# Altium PCB fpga_board.PcbDoc (part 2 of 4)
Units mil, origin at the board's own origin, x right, y up, seen from the top; angles counter-clockwise.
Board outline 3204.72 x 2960.63 mil, 6 copper layers (Top Layer, GND1, SIG, PWR, GND2, Bottom Layer), stack 32.112 mil thick; 192 components, 182 nets, 714 pads, 321 vias.
Unrouted connection lines stored in the file: 11.
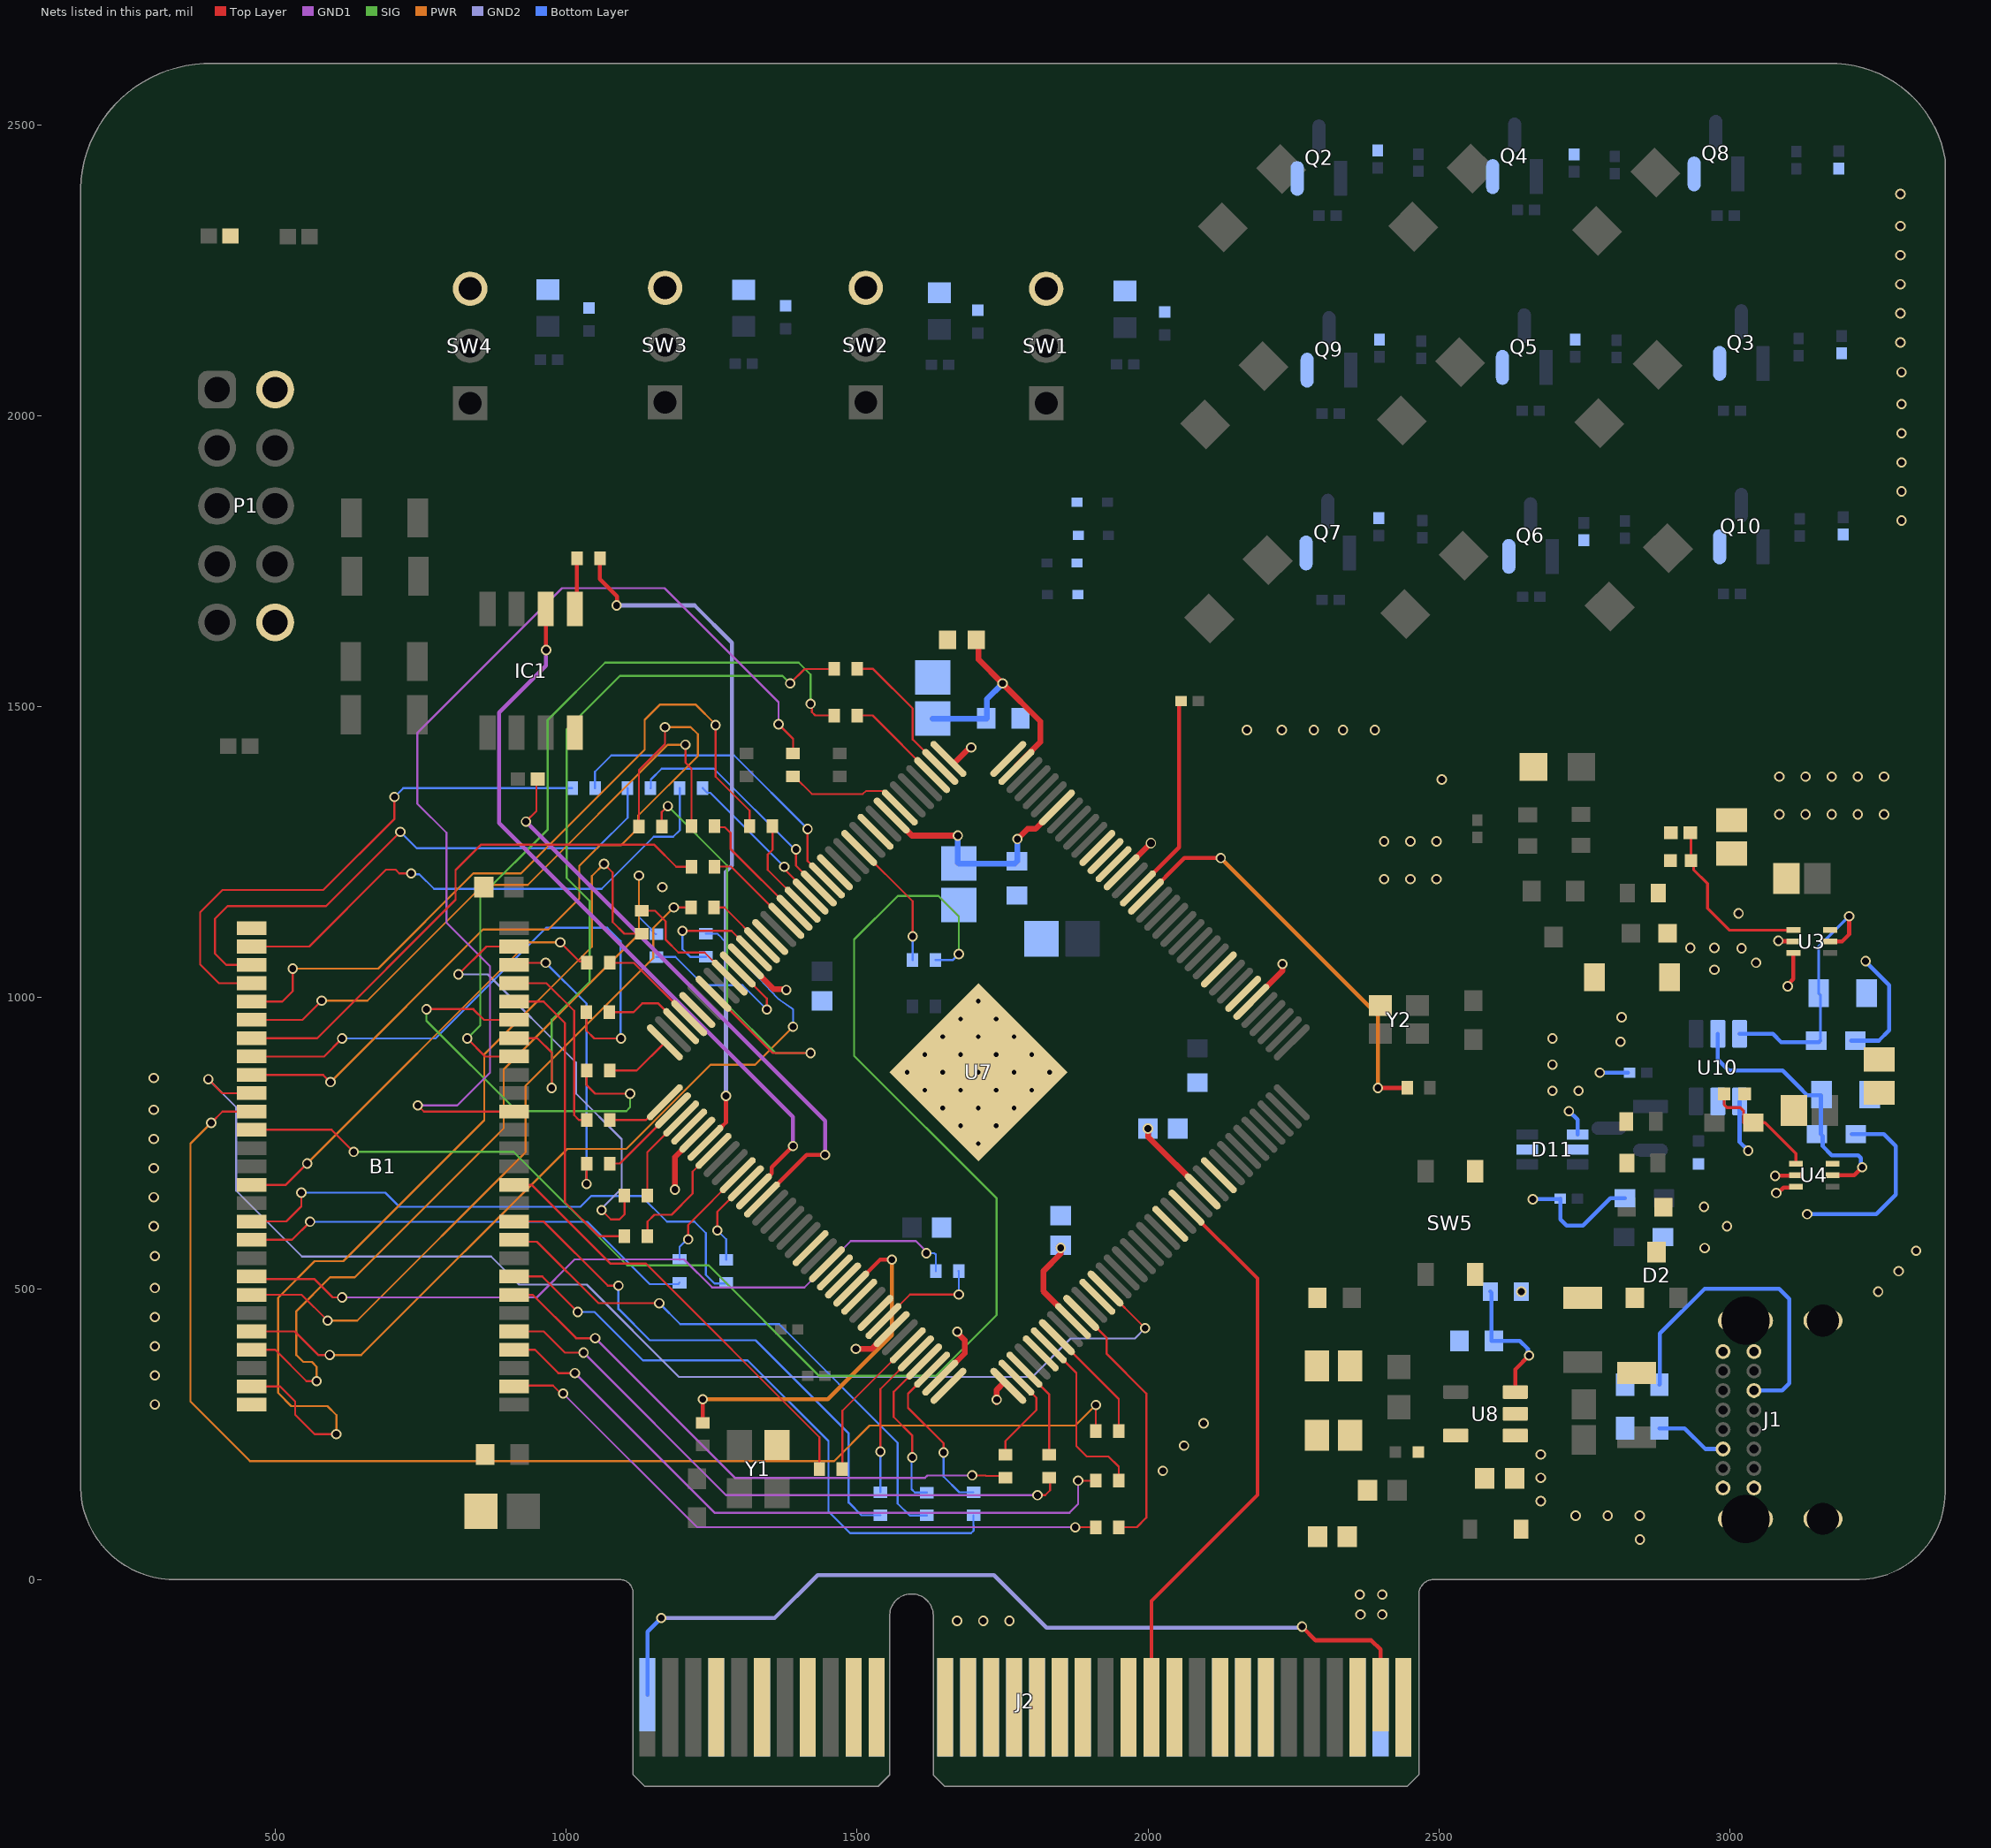
[diagram p6: the nets of this part, all layers, seen from the top]

## Part data (continued)
D1_1 D1_2 D1_3 D2_1 D2_2 D2_3 D3_1 D3_2 D3_3: library part CMP-22017-000041-1, "LED RED CLEAR CHIP SMD", Case Code (Imperial)=1206, Case Code (Metric)=3216, Color=Red, Forward Current=30mA, Forward Voltage=2V, Lens Color=Colorless, Max Operating Temperature=85°C, Min Operating Temperature=-55°C, Package Quantity=1, Power Dissipation=75mW, Reverse Voltage=5V, Test Current=20mA, Case/Package=1206, Depth=1.6mm, Dominant Wavelength=631nm, Height=1.1mm, Illumination Color=Red, Lead Free="Lead Free", Length=3.2mm, Lens Style=Diffused, Lens Transparency=Clear, Luminous Intensity=54mcd, Mount="Surface Mount", Number of Elements=1, Number of LEDs=1, Number of Pins=2, Packaging="Tape and Reel", Power Rating=75mW, Radiation Hardening=No, RoHS Compliant=Yes, Viewing Angle=130°, Wavelength=639nm, Width=1.6mm
D2: library part CMP-1060-01004-1, "Zener Voltage Regulator, 225 mW, 3-Pin SOT-23, Pb-Free, Tape and Reel", Manufacturer="On Semiconductor", ComponentLink1Description="Manufacturer URL", ComponentLink1URL=http://www.onsemi.com/, ComponentLink2Description=Datasheet, ComponentLink2URL=http://www.onsemi.cn/pub_link/Collateral/MMBZ5221BLT1-D.PDF, ComponentLink3Description="Package Specification", ComponentLink3URL=http://www.onsemi.cn/pub_link/Collateral/318-08.PDF, DatasheetVersion="Rev. 12", Mounting Technology="Surface Mount", PackageDescription="3-Pin Small Outline Transistor, Body 2.92 x 1.3 mm, Pitch 0.95 mm", PackageReference=SOT-23-3-318-08, PackageVersion="Rev. AP, 11/2009", Packing="Tape and Reel", PartNumber=MMBZ5223BLT1G, RoHS=Pb-Free, VZ Typ (V)=2.7
D3 D4: library part CMP-1426-00006-7, "WURTH ELEKTRONIK - 150060VS75000 - LED, Green, SMD, 0603, 30 mA, 2 V, 570 nm", Case Code (Imperial)=0603, Case Code (Metric)=1608, Color=Green, Forward Current=100mA, Forward Voltage=2V, Max Junction Temperature (Tj)=95°C, Max Operating Temperature=85°C, Max Reverse Voltage (DC)=5V, Min Operating Temperature=-40°C, Power Dissipation=72mW, Test Current=20mA, Case/Package=0603, Dominant Wavelength=570nm, Height=700µm, Length=1.6mm, Lens Style="Clear, Rectangular", Luminous Intensity=40mcd, Mount="Surface Mount", Number of Pins=2, Packaging="Tape and Reel", Peak Wavelength=572nm, REACH SVHC=Unknown, Reverse Voltage=5V, RoHS=Compliant, Viewing Angle=140°, Wavelength=570nm, Width=800µm
D5: library part CMP-44529-000062-1, "LED GREEN CLEAR CHIP SMD", Case Code (Imperial)=0805, Case Code (Metric)=2012, Color=Green, Forward Current=20mA, Forward Voltage=2.1V, Lens Color=Clear, Max Operating Temperature=85°C, Min Operating Temperature=-40°C, Package Quantity=1, Case/Package=0805, Dominant Wavelength=570nm, Height=0.4mm, Illumination Color=Green, Lead Free="Lead Free", Length=2mm, Lens Style=Clear, Luminous Intensity=40mcd, Mount="Surface Mount", Number of LEDs=1, Number of Pins=2, Packaging="Tape and Reel", RoHS Compliant=Yes, Series=APHCM, Test Current=20mA, Viewing Angle=110°, Wavelength=570nm, Width=1.25mm
D6: library part CMP-1055-00466-1, "Schottky Barrier Diode, 2-Pin SOD-323, Pb-Free, Tape and Reel", Manufacturer="On Semiconductor", ComponentLink1Description="Manufacturer URL", ComponentLink1URL=http://www.onsemi.com/, ComponentLink2Description=Datasheet, ComponentLink2URL=http://www.onsemi.cn/pub_link/Collateral/NSR0320MW2T1-D.PDF, ComponentLink3Description="Package Specification", ComponentLink3URL=http://www.onsemi.com/pub_link/Collateral/477-02.PDF.1, Configuration=Single, DatasheetVersion="Rev. 4", IFSM Max (A)=5, Mounting Technology="Surface Mount", PackageDescription="2-Pin SOD, Body 1.7 x 1.25 mm", PackageReference=SOD-323-2-477-02, PackageVersion="Rev. H, 03/2007", Packing="Tape and Reel", PartNumber=NSR0320MW2T1G, RoHS=TRUE
D7 D8 D9 D10: library part CMP-1060-00750-1, "Zener Voltage Regulator, 500 mW, 2-Pin SOD-523, Pb-Free, Tape and Reel", Manufacturer="On Semiconductor", ComponentLink1Description="Manufacturer URL", ComponentLink1URL=http://www.onsemi.com/, ComponentLink2Description=Datasheet, ComponentLink2URL=http://www.onsemi.cn/pub_link/Collateral/MM5Z2V4T1-D.PDF, ComponentLink3Description="Package Specification", ComponentLink3URL=http://www.onsemi.com/pub_link/Collateral/502-01.PDF, DatasheetVersion="Rev. 10", Mounting Technology="Surface Mount", P Max (W)=0.5, PackageDescription="2-Pin SOD, Body 1.2 x 0.8 mm", PackageReference=SOD-523-2-502-01, PackageVersion="Rev. E, 09/2010", Packing="Tape and Reel", PartNumber=MM5Z3V3T1G, RoHS=Pb-Free, VZ Typ (V)=3.3
D11: "Diode", MANUFACTURER_NAME="Texas Instruments", Mouser Part Number=595-LM66100DCKR, Arrow Part Number=LM66100DCKR, Arrow Price/Stock=https://www.arrow.com/en/products/lm66100dckr/texas-instruments?region=nac, Datasheet Link=http://www.ti.com/lit/gpn/LM66100, Height=1.1mm, MANUFACTURER_PART_NUMBER=LM66100DCKR, Mouser Price/Stock=https://www.mouser.co.uk/ProductDetail/Texas-Instruments/LM66100DCKR?qs=vLWxofP3U2y2yPPrXoBBoA%3D%3D
FB1: library part CMP-0686-00581-3, "Chip Ferrite Bead, 0603, 600Ω @ 100MHz, 0.15Ω, 25%, 1.3A", Case Code (Imperial)=0603, Case Code (Metric)=1608, Current Rating=1.3A, DC Resistance (DCR)=150mR, Inductor Type="FERRITE BEAD", Max Operating Temperature=125°C, Min Operating Temperature=-55°C, Package Quantity=1, Test Frequency=100MHz, Tolerance=25%, Case/Package=0603, Core Material=Ferrite, DC Current=1.3A, Depth=0.8mm, Height=0.8mm, Impedance=600R, Lead Free="Lead Free", Length=1.6mm, Material=Steel, Max Current Rating=1.3A, Max DC Current=1.3A, Military Standard=Not, Number of Circuits=1, Number of Lines=1, Number of Pins=2, Packaging="Tape and Reel", Radiation Hardening=No, REACH SVHC="No SVHC", RoHS Compliant=Yes, Series=BLM18K, Termination=SMD/SMT, Weight=7.1E-05oz, Width=0.8mm
IC1: "Integrated Circuit", MANUFACTURER_NAME=Intel, Mouser Part Number=989-EPCQ16ASI8N, Arrow Part Number=EPCQ16ASI8N, Arrow Price/Stock=https://www.arrow.com/en/products/epcq16asi8n/altera?utm_currency=USD&region=nac, Datasheet Link=https://www.altera.com/content/dam/altera-www/global/en_US/pdfs/literature/hb/cfg/cfg_cf52014.pdf, Height=1.75mm, MANUFACTURER_PART_NUMBER=EPCQ16ASI8N, Mouser Price/Stock=https://www.mouser.co.uk/ProductDetail/Altera/EPCQ16ASI8N?qs=EU6FO9ffTwfG9ViUTMZ%252BJw%3D%3D
J1: library part CMP-196119-000001-2, "CONN RCPT USB2.0 TYPE C 24POS RA", Contact Material="Copper Alloy", Contact Plating=Gold, Gender=Receptacle, Number of Positions=16, Orientation="Right Angle", USB Standard="USB 2.0"
L1 L2: library part CMP-08253-000154-1, "Shielded Multilayer Inductor 2.2uH ±20% 1000mA 195mΩ SMD 0805", Case Code (Imperial)=0805, Case Code (Metric)=2012, Current Rating=1A, DC Resistance (DCR)=195mR, Inductance=2.2uH, Max Operating Temperature=125°C, Min Operating Temperature=-40°C, Package Quantity=4000, Test Frequency=2MHz, Tolerance=20%, Case/Package=0805, Core Material=Ferrite, Height - Seated (Max)=0.039inch, Lead Free="Lead Free", Length=0.079inch, Mount="Surface Mount", Packaging="Tape and Reel", RoHS Compliant=Yes, Shielding=Shielded, Width=0.049inch
P1: library part CMP-1502-01084-4, "THT Vertical Pin Header WR-PHD, Pitch 2.54 mm, Dual Row, 10 pins", Color=Black, Contact Resistance=20mΩ, Current Rating=3A, Flammability Rating="UL94 V-0", Insulation Resistance=1GΩ, Max Operating Temperature=105°C, Min Operating Temperature=-40°C, Operating Supply Voltage=250V, Connector Type="Male Pin", Contact Gender=Male, Contact Material=Gold, Contact Mating Length=5.9944mm, Contact Plating=Gold, Gender=Male, Height=8.89mm, Housing Material=PBT, Insulation=Insulated, Lead Pitch=2.54mm, Length=12.7mm, Mount="Through Hole", Number of Contacts=10, Number of Pins=10, Number of Positions=10, Number of Rows=2, Orientation=Vertical, Packaging=Bulk, Pitch=2.54mm, RoHS=Compliant, Row Spacing=2.54mm, Termination="Through Hole", Voltage Rating=250V, Width=12.7mm
Q1 Q2 Q3 Q4 Q5 Q6 Q7 Q8 Q9 Q10: library part CMP-1058-00793-2, "MOSFET N-CH 60V 500MA SOT-23", Case/Package=SOT-23-3, Continuous Drain Current (ID)=500mA, Drain To Source Breakdown Voltage=60V, Drain To Source Resistance=5R, Gate to Source Voltage (Vgs)=20V, Input Capacitance=60pF, Max Operating Temperature=150°C, Max Power Dissipation=225mW, Min Operating Temperature=-55°C, Package Quantity=3000, Threshold Voltage=3V, Current Rating=500mA, Drain-source On Resistance-Max=5R, Element Configuration=Single, Height=0.94mm, Lead Free="Lead Free", Length=2.9mm, Nominal Vgs=3V, Number of Elements=1, Number of Pins=3, On-State Resistance=5R, Packaging="Tape and Reel", Polarity=N-CHANNEL, Polarization=N, Power Dissipation=225mW, Radiation Hardening=No, Rds On Max=5R, REACH SVHC="No SVHC", RoHS Compliant=Yes, Series=-, Turn-Off Delay Time=10ns, Turn-On Delay Time=10ns, Voltage Rating (DC)=60V, Width=1.3mm
Q11: library part CMP-1048-00670-1, "General Purpose Transistor, PNP Silicon, 3-Pin SOT-23, Pb-Free, Tape and Reel", Manufacturer="On Semiconductor", ComponentLink1Description="Manufacturer URL", ComponentLink1URL=http://www.onsemi.com/, ComponentLink2Description=Datasheet, ComponentLink2URL=http://www.onsemi.cn/pub_link/Collateral/MMBT3906LT1-D.PDF, ComponentLink3Description="Package Specification", ComponentLink3URL=http://www.onsemi.cn/pub_link/Collateral/318-08.PDF, DatasheetVersion="Rev. 11", fT Min (MHz)=250, IC Continuous (A)=-0.2, Mounting Technology="Surface Mount", PackageDescription="3-Pin Small Outline Transistor, Body 2.92 x 1.3 mm, Pitch 0.95 mm", PackageReference=SOT-23-3-318-08, PackageVersion="Rev. AP, 11/2009", Packing="Tape and Reel", PartNumber=MMBT3906LT1G, Polarity=PNP, RoHS=TRUE
R1 R6: library part CMP-1011-00768-4, "Chip Resistor, 200 KOhm, +/- 1%, 100 mW, -55 to 155 degC, 0402 (1005 Metric), RoHS, Tape and Reel", Case Code (Imperial)=0402, Case Code (Metric)=1005, Manufacturer="Basic Passives", Max Operating Temperature="155 degC", Min Operating Temperature="-55 degC", Package Quantity=10000, Power Rating="100 mW", Resistance="200 KOhm", Tolerance=1%, Voltage Rating="50 V", Case\/Package=0402, ComponentLink1Description="Manufacturer URL", ComponentLink1URL=http://www.panasonic.com/, ComponentLink2Description=Datasheet, ComponentLink2URL=http://industrial.panasonic.com/cdbs/www-data/pdf/RDA0000/AOA0000C86.pdf, DatasheetVersion=04/2015, Height="0.35 mm", Length="1 mm", Mount="Surface Mount", Mounting Technology="Surface Mount", PackageDescription="2-Pin Surface Mount Device, Body 1 x 0.5 mm", PackageReference=0402, Packaging="Tape and Reel", PartNumber=ERJ-2RKF2003X, Pins=2, Radiation Hardening=No, REACH SVHC="No SVHC", RoHSCompliant=true, Width="0.5 mm"
R1_1 R2_1 R3_1 R4_1 R5_1 R6_1 R7_1 R8_1 R9_1 R88 R90 R91 R92 R93 R94 R95 R96 R97 R98 R105 R106 R107 R108: library part CMP-2002-07613-1, Manufacturer="Yageo / Phycomp", Part Number=RC0402FR-07330RL
R1_2 R2_2 R3_2 R4_2 R5_2 R6_2 R7_2 R8_2 R9_2: library part CMP-2002-07915-3, "RES 10K OHM 5% 1/16W 0402", Case Code (Imperial)=0402, Case Code (Metric)=1005, Max Operating Temperature=155°C, Max Power Dissipation=63mW, Min Operating Temperature=-55°C, Package Quantity=1, Power Rating=62.5mW, Resistance=10kR, Resistance Tolerance=5%, Resistor Type="Thick Film", Temperature Coefficient=100ppm/°C, Voltage Rating=50V, Case/Package=0402, Construction=Rectangular, Depth=0.5mm, Features="Moisture Resistant", Height=0.016inch, Lead Free="Lead Free", Length=0.039inch, Military Standard=Not, Number of Terminations=2, Packaging="Tape and Reel", RoHS Compliant=Yes, Series=RC, Size Code=0402, Termination=SMD/SMT, Tolerance=5%, Width=0.02inch
R2: library part CMP-2002-07343-1, Manufacturer="Yageo / Phycomp", Part Number=RC0402FR-07100KL
R7: library part CMP-03412-048226-1, "RES 50K OHM 0.1% 1/10W 0603"
R8: library part CMP-2000-06927-1, "Chip Resistor, 13 KOhm, +/- 1%, 0.1 W, -55 to 155 degC, 0603 (1608 Metric), RoHS, Tape and Reel", Case Code - in=0603, Case Code - mm=1608, Manufacturer=Yageo, Operating Temperature Range=-55Cto+155C, Package Description="2-Pin Surface Mount Device, Body 1.6 x 0.8 mm", Power Rating=100mW, Resistance=13kOhms, Temperature Coefficient=100PPM/C, Tolerance=1%, Voltage Rating=50V, Datasheet URL=http://www.yageo.com/documents/recent/PYu-RC_Group_51_RoHS_L_7.pdf, Datasheet Version="Rev. 7, 05/2017", Manufacturer URL=http://www.yageo.com/, Mounting Technology=SurfaceMount, Package Reference=0603, Packaging=Reel, Product=ThickFilmResistorsGeneralPurpose, Series=RC, Termination Style=SMD/SMT
R9 R10 R57 R87 R89: library part CMP-2100-03664-2, "RES 10K OHM 1% 1/10W 0603", Case Code (Imperial)=0603, Case Code (Metric)=1608, Max Operating Temperature=155°C, Max Power Dissipation=100mW, Min Operating Temperature=-55°C, Resistance=10kR, Resistance Tolerance=1%, Resistor Type="Thick Film", Temperature Coefficient=100ppm/°C, Voltage Rating=75V, Voltage Rating (DC)=50V, Case/Package=0603, Construction=Rectangular, Depth=0.8mm, Features="Moisture Resistant", Height=0.45mm, Lead Free="Lead Free", Lead Pitch=0.3mm, Length=1.6mm, Military Standard=Not, Number of Pins=2, Number of Terminations=2, Packaging="Tape and Reel", Power Rating=100mW, RoHS Compliant=Yes, Series=RC, Size Code=0603, Termination=SMD/SMT, Tolerance=1%, Weight=7.1E-05oz, Width=0.8mm
R20 R21 R23 R24 R25 R26 R27 R28 R29 R30 R31 R32 R33 R34 R35 R36 R37 R38 R39 R40 R41 R42 R44 R45 R46 R47 R48 R49 R50 R52 R60 R63 R64 R65 R66 R67 R68 R69: library part CMP-00621-71392720-1, "RT0402BRE0750RL Fixed Resistor, Thin Film, 0.0625W, 50ohm, 50V, 0.1% +/-Tol, 50ppm/Cel, Surface Mount, 0402", Case/Package=0402, Max Operating Temperature=155°C, Max Power Dissipation=63mW, Min Operating Temperature=-55°C, Resistance=50Ω, Temperature Coefficient=50ppm/°C, Tolerance=0.1%, Composition="Thin Film", Features="Moisture Resistant", Height=355.6µm, Length=990.6µm, NexarPartId=71392720, Number of Terminations=2, Packaging="Tape & Reel", RoHS=Compliant, Width=508µm
R53 R54 R55 R56: library part CMP-1012-00086-1, "3K3 0.1W 5% 0603 (1608 Metric)  SMD", Case-EIA=0603, Case-Metric=1608, Power="0.1 W", Tolerance="5 %", Technology=SMT
R58 R59: library part CMP-2000-04091-1, Manufacturer=Yageo, Part Number=RC0603FR-075K1L
R61: library part CMP-03412-049221-1, "RES 47kΩ 5.00% 0.1W 0603", Case Code (Imperial)=0603, Case Code (Metric)=1608, Max Operating Temperature=155°C, Max Power Dissipation=100mW, Min Operating Temperature=-55°C, Ratings=AEC-Q200, Resistance=47kR, Resistor Type="Thick Film", Temperature Coefficient=100ppm/°C, Tolerance=5%, Voltage Rating=50V, Case/Package=0603, Features="Moisture Resistant", Height=0.45mm, Length=1.6mm, Number of Terminations=2, Packaging="Tape and Reel", Power Rating=100mW, RoHS Compliant=Yes, Series=AC, Termination=SMD/SMT, Width=0.8mm
R70 R71: library part CMP-1012-00567-3, Case Code (Imperial)=0603, Max Operating Temperature=155°C, Max Power Dissipation=100mW, Min Operating Temperature=-55°C, Resistance=3.3kΩ, Temperature Coefficient=100ppm/°C, Tolerance=1%, Voltage Rating=50V, Case Code (Metric)=0603, Case/Package=0603, Composition="Thick Film", Depth=800µm, Features="Moisture Resistant", Height=450µm, Lead Free="Lead Free", Length=1.6mm, Military Standard=Not, Mount="Surface Mount", NexarPartId=40011875, Number of Pins=2, Number of Terminations=2, Packaging="Tape & Reel", Power Rating=100mW, REACH SVHC="No SVHC", RoHS=Compliant, Schedule B="8533210045, 8533210045", Termination=SMD/SMT, Voltage Rating (AC)=50V, Voltage Rating (DC)=50V, Width=800µm
R72 R73: library part CMP-2002-02979-2, "RES SMD 33 OHM 0.1% 1/16W 0402", Manufacturer=Yageo, Package=RT0402, Power Rating=0.063W, Resistance=33Ω, Temperature="-55°C to +155°C", Temperature Coefficient="50 ppm/°C", Temperature Range High=+155°C, Temperature Range Low=-55°C, Tolerance=0.001, Voltage Rating=50V, Automotive=No, Category=Res, ComponentLink2Description=Datasheet, ComponentLink2URL=http://www.yageo.com/documents/recent/PYu-RT_1-to-0.01_RoHS_L_9.pdf, Composition="Thin Film", Device Class L1="Passive Components", Device Class L2=Resistors, Device Class L3="Chip SMD Resistors", Digikey Description="RES SMD 33 OHM 0.1% 1/16W 0402", Footprint Url=http://www.yageo.com/exep/pages/download/literatures/PYu-R_Mount_10.pdf, Height=0.35mm, Ipc Land Pattern Name=RESC10050X30, Lead Free=Yes, Manufacturer Part Number=RT0402BRE0733RL, Octopart=https://octopart.com/rt0402bre0733rl-yageo-1202878, RoHS=TRUE, Series=RT
R74 R75 R76 R83 R84: library part CMP-2002-07353-1, Manufacturer="Yageo / Phycomp", Part Number=RC0402FR-0710KL
R80 R85 R109 R110: library part CMP-2100-03662-2, "RES SMD 100K OHM 1% 1/10W 0603", Case Code (Imperial)=0603, Case Code (Metric)=1608, Max Operating Temperature=155°C, Max Power Dissipation=100mW, Min Operating Temperature=-55°C, Resistance=100kR, Resistance Tolerance=1%, Resistor Type="Thick Film", Temperature Coefficient=100ppm/°C, Voltage Rating=50V, Working Voltage=75V, Case/Package=0603, Construction=Rectangular, Depth=0.8mm, Features="Moisture Resistant", Height=0.45mm, Lead Free="Lead Free", Length=1.6mm, Military Standard=Not, Number of Pins=2, Number of Terminations=2, Packaging="Tape and Reel", Power Rating=100mW, REACH SVHC="No SVHC", RoHS Compliant=Yes, Series=RC, Technology="THICK FILM", Termination=SMD/SMT, Tolerance=1%, Voltage Rating (DC)=50V, Width=0.8mm
R81 R86: library part CMP-2001-01722-2, "RES SMD 200K OHM 0.1% 1/8W 0805", Manufacturer=Yageo, Package=RT0805, Power Rating=0.125W, Resistance=200KΩ, Temperature="-55°C to +155°C", Temperature Coefficient="25 ppm/°C", Temperature Range High=+155°C, Temperature Range Low=-55°C, Tolerance=0.0025, Voltage Rating=150V, Automotive=No, Category=Res, ComponentLink2Description=Datasheet, ComponentLink2URL=http://www.yageo.com/documents/recent/PYu-RT_1-to-0.01_RoHS_L_9.pdf, Composition="Thin Film", Device Class L1="Passive Components", Device Class L2=Resistors, Device Class L3="Chip SMD Resistors", Digikey Description="RES SMD 200K OHM 0.1% 1/8W 0805", Footprint Url=http://www.yageo.com/exep/pages/download/literatures/PYu-R_Mount_10.pdf, Height=0.6mm, Ipc Land Pattern Name=RESC200125X50, Lead Free=Yes, Manufacturer Part Number=RT0805BRD07200KL, Mouser Description="High Precision-High Stability Chip Resistor Thin Film 0805 200kOhm 0.1% Paper T/R", Octopart=https://octopart.com/rt0805brd07200kl-yageo-1477199, RoHS=TRUE, Series=RT
R100: library part CMP-2002-07961-2, "RES SMD 22 OHM 5% 1/16W 0402", Case Code (Imperial)=0402, Case Code (Metric)=1005, Max Operating Temperature=155°C, Max Power Dissipation=63mW, Min Operating Temperature=-55°C, Package Quantity=1, Power Rating=62.5mW, Resistance=22R, Resistance Tolerance=5%, Resistor Type="Thick Film", Temperature Coefficient=100ppm/°C, Voltage Rating=50V, Case/Package=0402, Construction=Rectangular, Depth=0.5mm, Features="Moisture Resistant", Height=0.016inch, Lead Free="Lead Free", Length=0.039inch, Military Standard=Not, Number of Terminations=2, Packaging="Tape and Reel", REACH SVHC="No SVHC", RoHS Compliant=Yes, Series=RC, Size Code=0402, Termination=SMD/SMT, Tolerance=5%, Width=0.02inch
R101 R102 R103: library part CMP-2002-07472-3, "RES 1K OHM 1% 1/16W 0402", Case Code (Imperial)=0402, Case Code (Metric)=1005, Max Operating Temperature=155°C, Max Power Dissipation=63mW, Min Operating Temperature=-55°C, Power Rating=62.5mW, Resistance=1kR, Resistance Tolerance=1%, Resistor Type="Thick Film", Temperature Coefficient=100ppm/°C, Voltage Rating=50V, Case/Package=0402, Construction=Rectangular, Depth=0.5mm, Features="Moisture Resistant", Height=0.32mm, Lead Free="Lead Free", Length=1mm, Military Standard=Not, Number of Pins=2, Number of Terminations=2, Packaging="Tape and Reel", Reach SVHC Compliant=Yes, RoHS Compliant=Yes, Series=RC, Size Code=0402, Technology="THICK FILM", Termination=SMD/SMT, Tolerance=1%, Voltage Rating (DC)=50V, Width=0.5mm
R111 R112 R113 R114: library part CMP-00030-39388935-1, "CRCW12060000ZSTA Zero Ohm Resistor, Jumper, 1206 [3216 Metric], Thick Film, 250 mW, Surface Mount", Case Code (Imperial)=1206, Case Code (Metric)=3216, Max Operating Temperature=155°C, Max Power Dissipation=250mW, Min Operating Temperature=-55°C, Resistance=0Ω, Temperature Coefficient=100ppm/°C, Voltage Rating=200V, Case/Package=1206, Composition="Thick Film", Contact Plating="Lead, Tin", Depth=1.6mm, Features="Automotive AEC-Q200", Height=609.6µm, Lead Free="Contains Lead", Length=3.2mm, Military Standard=Not, Mount="Surface Mount", NexarPartId=39388935, Number of Terminations=2, Packaging="Cut Tape", Power Rating=250mW, Radiation Hardening=No, REACH SVHC=Unknown, RoHS=Compliant, Termination=SMD/SMT, Voltage Rating (DC)=200V, Weight=10.007382mg, Width=1.6mm
SW1 SW2 SW3 SW4: library part CMP-1696-00002-1, "Slide Switch, 500 V, -20 to 70 degC, 3-Pin THD, RoHS", Case\Package=SOT-23-5, Dropout Voltage="300 mV", Max Input Voltage="8 V", Max Operating Temperature="85 degC", Max Ouput Current="150 mA", Max Power Dissipation="250 mW", Min Input Voltage="4.3 V", Min Operating Temperature="-40 degC", Nominal Output Voltage="3.3 V", Package Quantity=3000, ComponentLink1Description="Manufacturer URL", ComponentLink1URL=http://www.e-switch.ch/en/, ComponentLink2Description=Datasheet, ComponentLink2URL=https://www.e-switch.com/system/asset/product_line/data_sheet/119/EG.pdf, DatasheetVersion=Oct-15, Height="1.3 mm", Length="3 mm", Mount="Surface Mount", Output Current="150 mA", Output Voltage="3.3 V", Outputs=1, PackageDescription="3-Pin Through Hole Device, Body 11.6 x 4 mm, Pitch 2.5 mm", PackageReference=EG1218, Packaging="Tape and Reel", Pins=5, Power Rating="250 mW", Radiation Hardening=No, REACH SVHC="No SVHC", RoHSCompliant=true, Width="1.8 mm"
SW5: "No Description Available", MANUFACTURER_NAME="C&K Components", Copyright="Copyright (C) 2026 Ultra Librarian. All rights reserved.", MANUFACTURER_PART_NUMBER="PTS815 SJM 250 SMTR LFS", RefDes=RefDes, Type=Type
U3 U4: "No Description Available", MANUFACTURER_NAME="Diodes Inc", Copyright="Copyright (C) 2025 Ultra Librarian. All rights reserved.", MANUFACTURER_PART_NUMBER=AP61300Z6-7, RefDes=RefDes, Type=Type
U7: library part CMP-0038-00212-1, "Cyclone IV Family FPGA, 1.2V Core, 91 I/O Pins, 2 PLLs, 144-Pin QFP, Speed Grade 8, Commercial Grade, Pb-Free", Manufacturer=Altera, Code_JEDEC=MS-026-BFB-HD, ComponentLink1Description="Manufacturer URL", ComponentLink1URL=http://www.altera.com/, ComponentLink2Description=Handbook, ComponentLink2URL=http://www.altera.com/literature/hb/cyclone-iv/cyclone4-handbook.pdf, ComponentLink3Description=Pinout, ComponentLink3URL=http://www.altera.com/literature/lit-dp.jsp?category=cyc%204&showspreadsheet=y, ComponentLink4Description="Package Specification", ComponentLink4URL=http://www.altera.com/devicepackaging/04R00402-00.pdf, DatasheetVersion="ver1.6, Nov-2011", PackageDescription="144-Pin Plastic Enhanced Quad Flat Pack (EQFP) - Wire Bond - A:1.65 - D2:5.4", PackageReference=EQFP144_A-165_D2-54, PackageVersion="ver1.0, Jan-2011"
U8: library part CMP-04917-000053-1, "IC REG LINEAR 3.3V 300MA SOT23-5", Dropout Voltage=125mV, Manufacturer="Texas Instruments", Max Junction Temp=+125°C, Max Supply Voltage=5.5V, Min Supply Voltage=1.4V, Nominal Supply Current=34uA, Output Current=300mA, Output Voltage=3.3V, Package=DBV0005A, Temperature="-40°C to +125°C", Temperature Range Low=-40°C, Accuracy Percentage=1%, Automotive=No, Category=IC, ComponentLink2Description=Datasheet, ComponentLink2URL=http://www.ti.com/lit/ds/symlink/tlv733p.pdf, Device Class L1="Integrated Circuits (ICs)", Device Class L2="Power Management ICs", Device Class L3="Voltage Regulators - Linear", Digikey Description="IC REG LINEAR 3.3V 300MA SOT23-5", Height=1.45mm, Lead Free=Yes, Manufacturer Part Number=TLV73333PDBVR, Mouser Description="LDO Voltage Regulators Capacitr-Free 300-mA 5-SOT-23 -40 to 125", Number Of Outputs=1, Octopart=https://octopart.com/tlv73333pdbvr-texas+instruments-51080890, Output Type=Fixed, RoHS=TRUE, Standoff Height=0mm, Temperature Range High=+125°C
U10: library part CMP-0063-01011-4, "Power Sequencer, 6-pin SOT-23, Pb-Free, 1000 Reel", Manufacturer="Texas Instruments", PackageTopMarking=F21A*XTT, PowerWise=N, Code_IPC=SOT26A-6, Code_JEDEC=MO-178-AB, ComponentLink1Description="Datasheet URL", ComponentLink1URL=http://www.ti.com/general/docs/lit/getliterature.tsp?genericPartNumber=LM3880&fileType=pdf, CompType=MiscPower, High-Reliability=Y, PackageDescription="Molded SOT-23, .115 x .063 x .040in Body, 6 Lead, .0375in in Pitch", PackageReference=DBV0006A, PartNumber=LM3880MF-1AB/NOPB, PinCount=6, RoHS=Y
Y1: library part CMP-27762-009764-1, "XTAL Oscillator 50MHz ±50ppm CMOS 3.3V 4-SMD 3.2mm x 2.5mm", Case/Package=SMD/SMT, Frequency=50MHz, Frequency Stability=50ppm, Load Capacitance=15pF, Max Operating Temperature=85°C, Max Supply Current=19mA, Max Supply Voltage=3.465V, Min Operating Temperature=-40°C, Min Supply Voltage=3.135V, Operating Frequency="50 MHz", Operating Supply Voltage=3.3V, Package Quantity=1000, Depth=2.5mm, Height=0.047inch, Lead Free="Lead Free", Length=3.2mm, Mount="Surface Mount", Number of Pins=4, Packaging="Tape and Reel", Radiation Hardening=No, REACH SVHC="No SVHC", Series=ASE, Termination=SMD/SMT, Width=0.098inch
Y2: "Crystal or Oscillator", MANUFACTURER_NAME=ABRACON, Mouser Part Number=815-ASDDV-2500MHZLCT, Arrow Part Number=ASDDV-25.000MHZ-LC-T, Arrow Price/Stock=https://www.arrow.com/en/products/asddv-25.000mhz-lc-t/abracon?region=nac, Datasheet Link=https://abracon.com/datasheets/ASDDV.pdf, Height=0.95mm, MANUFACTURER_PART_NUMBER=ASDDV-25.000MHZ-LC-T, Mouser Price/Stock=https://www.mouser.co.uk/ProductDetail/ABRACON/ASDDV-25.000MHZ-LC-T?qs=GedFDFLaBXGr7Q4o6E2H1w%3D%3D

## Via types
v1: diameter 17.72, hole 11.81, Top Layer to Bottom Layer, 284 vias
v2: diameter 19.68, hole 7.87, Top Layer to Bottom Layer, 25 vias
v3: diameter 17.72, hole 13.78, Top Layer to Bottom Layer, 10 vias
v4: diameter 23.62, hole 17.72, Top Layer to Bottom Layer, 2 vias

## Nets (pads, with @x,y where several pads share a name; then routed paths per layer and width w, separated by ;. In a path a pad name is that pad's centre, name@x,y a point inside that pad or via, vN(x,y) a via of type N, cw(c..) or ccw(c..) an arc to the next point about the centre after c; other vN are vias at no path point)
1.2V: C8.1 C19.2 C20.2 C21.1 C22.2 D1.1 D3.2 L1.2 R1.1 U3.6 U7.5 U7.29 U7.45 U7.61 U7.78 U7.102 U7.116 U7.134 | length 1076.1
  Top Layer w10: v1(1187.01,670.28) 1187.01,726.2 U7.5@1225.4,764.6 ; U7.134@1308.92,1062.47 1356.58,1014.81 1376.75,1014.81 v1(1378.23,1013.34) ; v1(1498.03,396.65) 1525.1,396.65 1558.98,430.53 U7.29@1559.47,430.53 ; U7.116@1559.47,1313.02 1559.96,1313.02 1594.44,1278.54 v1(1673.23,1278.54) ; v1(1775.59,1272.64) 1793.31,1290.35 1806.84,1290.35 U7.102@1843.43,1326.94 ; v1(1850,570) 1850,560 1820,530 1820,495.71 U7.45@1871.26,444.45 ; v1(2000,775) 2000,761.14 U7.61@2093.97,667.16 ; U7.78@2177.49,992.88 2231.3,1046.68 v1(2231.3,1058.07)
  Bottom Layer w10: v1(1673.23,1278.54) 1673.23,1232.2 C22.2@1675,1230.43 1770.91,1230.43 1775.59,1235.12 v1(1775.59,1272.64)
  other v1: 2812.01,924.21 2813.98,966.54 2973.43,1048.23 2932.09,1085.63 2973.43,1085.63
2.5V: C10.1 C16.1 C17.2 C18.1 D2.3 D4.2 L2.2 R6.1 U4.6 U7.35 U7.37 U7.94 U7.107 U7.109 | length 698.8
  Top Layer w10: U7.35@1642.99,347.01 1685.04,389.07 1685.04,411.3 1672.24,424.09 v1(1672.24,426.18) ; 1670.28,1406.5 v1@1693.81,1430.03 ; C16.1@1708.54,1615 1708.54,1581.46 v1(1750,1540) 1815,1475 1815,1439.44 1773.83,1398.26 U7.107@1773.83,1396.54 ; v1@1740,305 1740,326.16 1752.83,338.99 1754.01,338.99 U7.37@1759.91,333.09 ; U7.94@1954.78,1215.59 v3(2004.92,1265.75)
  Bottom Layer w10: C17.2@1630,1479.57 1722.44,1479.57 1722.88,1480 1722.88,1512.88 v1(1750,1540)
  other v1: 1740,309.09 2956.69,569.88 2995.08,607.28 2955.71,640.75 1696.06,1429.97
3v3: C7.1 C9.1 C25.2 D11.1 J2.A30 J2.A31 J2.A32 J2.B30 J2.B32 R80.2 R83.2 R84.1 R85.2 R109.2 U3.3 U4.3 U8.5 U10.1 | length 1045.8
  Top Layer w7: v1(3079.72,664.37) 3082.62,664.37 3092.07,673.82 3112,673.82 U4.3@3113.5,675.32 ; v1(3099.41,1019.68) 3099.41,1022.58 3109.25,1032.43 U3.3@3109.25,1076.77
  Bottom Layer w7: v1(2661.42,653.54) 2661.91,654.04 2708.17,654.04 R84.1@2708.66,654.53 2708.66,619.09 2719.49,608.27 2747.56,608.27 2794.8,655.51 R109.2@2819.88,655.51 ; v1(2723.43,805.12) 2738.19,790.35 D11.1@2738.19,764.76 ; v1(2776.57,871.06) R83.2@2824.8,871.06 ; U10.1@3016.73,821.85 3016.73,751.97 v1(3031.5,737.2) ; v1(3132.87,627.95) 3251.97,627.95 3285.43,661.42 3285.43,745.08 3264.76,765.75 R85.2@3209.65,765.75 ; R80.2@3208.66,926.18 3255.91,926.18 3273.62,943.9 3273.62,1021.43 3233.27,1061.79 v1(3233.27,1062.99)
  other v1: 2365.16,-60.04 2402.56,-60.04 2364.17,-25.59 2402.56,-25.59
5V: C34.2 D6.1 R57.2 U8.1
  other v1: 2845.47,68.9 2735,110 2790,110 2845,110 2675,135 2675,175 2675,215 2641.64,495
"25MHz CLK": R73.2 U7.91 | length 713
  Top Layer w7: U7.91@1996.54,1173.83 2062.71,1240 v1(2125,1240) ; v1(2395,845) R73.2@2445.31,845
  PWR w7: v1(2125,1240) 2395,970 v1(2395,845)
50MHZ_CLK: R72.2 U7.24 | length 626.8
  Top Layer w7: R72.2@1234.57,269.68 1235,270.12 v1(1235,310) ; U7.24@1489.87,500.13 1539.74,550 v1@1555,550
  PWR w7: v1(1235,310) 1450,310 1560,420 v1(1560,550)
"Addr Bit 0": B1.23 R37.1 | length 537.4
  Top Layer w3.5: B1.23@910.51,993.46 961.26,993.46 998.03,956.69 998.03,648.62 1056.65,590 R37.1@1100.31,590
"Addr BIt 0 Term": R37.2 U7.7 | length 211.1
  Top Layer w3.5: R37.2@1139.68,590 1139.76,590.08 1139.76,615.16 1151.57,626.97 1181.1,626.97 1217.52,663.39 1217.52,701.04 U7.7@1253.24,736.76
"Addr Bit 1": B1.24 R38.1 | length 327.4
  Top Layer w3.5: B1.24@910.51,1024.96 966.18,1024.96 1013.78,977.36 1013.78,798.23 1022.01,790 R38.1@1035.63,790
"Addr Bit 1 Term": R38.2 U7.1 | length 107.3
  Top Layer w3.5: R38.2@1075,790 1137.2,790 1167.48,820.27 U7.1@1169.73,820.27
"Addr Bit 2": B1.25 R39.1 | length 500.2
  Top Layer w3.5: B1.25@910.51,1056.46 914.05,1060 v1(965,1060) ; v1(1035,680) 1035,714.37 R39.1@1035.63,715
  Bottom Layer w3.5: v1(965,1060) 1035,990 v1(1035,680)
"Addr Bit 2 Term": R39.2 U7.2 | length 146.5
  Top Layer w3.5: R39.2@1075,715 1092.29,715 U7.2@1183.64,806.36
"Addr Bit 3": B1.26 R40.1 | length 762.1
  Top Layer w3.5: v1(815,1040) 862.95,1087.95 B1.26@910.51,1087.95 ; v1(1061.02,634.84) 1076.77,619.09 1091.54,619.09 1100.31,627.87 R40.1@1100.31,660
  GND2 w3.5: v1(815,1040) 865.51,1040 1016.73,888.78 1016.73,835.63 1095.47,756.89 1095.47,672.24 1061.02,637.8 v1(1061.02,634.84)
"Addr Bit 3 Term": R40.2 U7.3 | length 156.4
  Top Layer w3.5: R40.2@1139.68,660 1139.68,734.56 U7.3@1197.56,792.44
"Addr Bit 4 Term": R41.2 U7.126 | length 266.2
  Top Layer w3.5: v1(1375,1225) 1375,1221.35 1420.27,1176.08 U7.126@1420.27,1173.83
  Bottom Layer w3.5: R41.2@1234.68,1360 1242.41,1352.27 1247.73,1352.27 v1(1375,1225)
"Addr Bit 5 Term": R42.2 U7.125 | length 413.3
  Top Layer w3.5: v1(1395,1255) 1395,1226.94 U7.125@1434.19,1187.75
  Bottom Layer w3.5: R42.2@1145,1360 1145.68,1360.68 1145.68,1375.01 1164.37,1393.7 1253.94,1393.7 1392.64,1255 v1(1395,1255)
"Addr Bit 6 Term": R44.2 U7.124 | length 559.6
  Top Layer w3.5: v1(1415,1290) 1415,1234.78 U7.124@1448.11,1201.67
  Bottom Layer w3.5: R44.2@1049.68,1360 1049.68,1388.27 1077.76,1416.34 1288.66,1416.34 v1(1415,1290)
"Addr Bit 7 Term": R45.2 U7.127 | length 163.3
  Top Layer w3.5: R45.2@1354.68,1295 1354.68,1254.29 1346.46,1246.06 1346.46,1219.81 U7.127@1406.36,1159.91
"Addr Bit 8 Term": R46.2 U7.128 | length 215.3
  Top Layer w3.5: R46.2@1255,1295 1256.97,1293.03 1272.91,1293.03 1282.48,1283.46 1282.48,1255.95 U7.128@1392.44,1145.99
"Addr Bit 9": B1.34 R47.1 | length 939.1
  Top Layer w3.5: B1.34@459.49,930.47 572.2,930.47 810.04,1168.31 810.04,1219.49 853.35,1262.8 1151.57,1262.8 1189.37,1225 R47.1@1215.31,1225
"Addr Bit 9 Term": R47.2 U7.129 | length 162.7
  Top Layer w3.5: R47.2@1254.68,1225 1255.08,1225.39 1283.46,1225.39 1376.79,1132.07 U7.129@1378.52,1132.07
"Addr Bit 10": B1.22 R48.1 | length 724.3
  Top Layer w3.5: v1(760,980) 760.31,980.32 840.55,980.32 858.9,961.97 B1.22@910.51,961.97 ; R48.1@1035.31,875 1035.31,849.53 1049.84,835 v1(1110,835)
  SIG w3.5: v1(760,980) 760,960.47 915.35,805.12 1103.35,805.12 1110,811.77 v1(1110,835)
"Addr Bit 10 Term": R48.2 U7.144 | length 115
  Top Layer w3.5: R48.2@1074.68,875 1121.45,875 U7.144@1169.73,923.28
"Addr Bit 11": B1.35 R49.1 | length 999.3
  Top Layer w3.5: B1.35@459.49,898.98 583.98,898.98 v1(615,930) ; R49.1@1035,975 1035,943.35 1048.23,930.12 1094.25,930.12 v1(1094.37,930)
  Bottom Layer w3.5: v1(615,930) 775.47,930 965.55,1120.08 1070.87,1120.08 1093.5,1097.44 1093.5,930.87 v1(1094.37,930)
"Addr Bit 11 Term": R49.2 U7.142 | length 145.6
  Top Layer w3.5: R49.2@1074.37,975 1115.75,975 1130.91,990.16 1158.52,990.16 U7.142@1197.56,951.12
"Addr Bit 12": B1.36 R50.1 | length 1337.9
  Top Layer w3.5: B1.36@459.49,867.48 582.32,867.48 594.8,855 v1(595,855) ; R50.1@1125,1294.29 1125,1390.75 1170,1435.75 v1(1170,1465)
  PWR w3.5: v1(595,855) 857.13,1117.13 969.49,1117.13 1022.64,1170.28 1022.64,1226.38 1058.07,1261.81 1094.49,1261.81 1124.02,1291.34 1124.02,1312.99 1226.38,1415.35 1226.38,1452.67 1214.05,1465 v1(1170,1465)
"Addr Bit 12 Term": R50.2 U7.138 | length 809.4
  Top Layer w3.5: R50.2@1164.37,1294.29 1164.37,1318.98 v1(1174.68,1329.29) ; U7.138@1253.24,1006.8 1355.04,905 v1(1420,905)
  SIG w3.5: v1(1174.68,1329.29) 1276.57,1227.4 1276.57,988.19 1359.76,905 v1(1420,905)
"Address Bit 4": B1.29 R41.1 | length 918.1
  Top Layer w3.5: B1.29@459.49,1087.95 558.43,1087.95 690.47,1220 706.98,1220 713.31,1213.67 v1(733.67,1213.67)
  Bottom Layer w3.5: v1(733.67,1213.67) 735.12,1212.22 747.78,1212.22 772.99,1187.01 1061.02,1187.01 1150.59,1276.57 1184.06,1276.57 1195.31,1287.83 R41.1@1195.31,1360
"Address Bit 5": B1.30 R42.1 | length 985.7
  Top Layer w3.5: B1.30@459.49,1056.46 415.98,1056.46 396.65,1075.79 396.65,1135.83 418.31,1157.48 587.48,1157.48 v1(715,1285)
  Bottom Layer w3.5: v1(715,1285) 743.11,1256.89 1053.15,1256.89 1105.63,1309.37 R42.1@1105.63,1360
"Address Bit 6": B1.31 R44.1 | length 941
  Top Layer w3.5: B1.31@459.49,1024.96 403.19,1024.96 371.06,1057.09 371.06,1146.65 409.45,1185.04 582.68,1185.04 705,1307.36 v1(705,1345)
  Bottom Layer w3.5: v1(705,1345) 720,1360 R44.1@1010.31,1360
"Address Bit 7": B1.32 R45.1 | length 1274.5
  Top Layer w3.5: B1.32@459.49,993.46 512.17,993.46 530,1011.3 v1(530,1050) ; v1(1256.89,1468.5) 1256.89,1379.92 1315.31,1321.5 R45.1@1315.31,1295
  PWR w3.5: v1(530,1050) 676.97,1050 840.55,1213.58 922.24,1213.58 1134.84,1426.18 1134.84,1477.36 1161.42,1503.94 1222.44,1503.94 1256.89,1469.49 v1(1256.89,1468.5)
"Address Bit 8": B1.33 R46.1 | length 1085.6
  Top Layer w3.5: B1.33@459.49,961.97 546.97,961.97 v1(580,995) ; v1(1205,1434.79) 1205,1404.25 1215.55,1393.7 1215.55,1295.08 R46.1@1215.63,1295
  PWR w3.5: v1(580,995) 658.39,995 857.28,1193.9 934.05,1193.9 1174.95,1434.79 v1(1205,1434.79)
"Aux. En": R85.1 R86.2 U4.5 U10.5 | length 483.1
  Top Layer w7: U4.5@3176.5,695 3213.65,695 3227.31,708.66 v1(3227.36,708.66)
  Bottom Layer w7: U10.5@2979.33,937.99 2979.33,893.7 2998.03,875 3090.55,875 3117.13,848.43 3132.87,832.68 3156.5,832.68 3156.5,765.75 3159.45,762.8 3159.45,745.08 3175.2,729.33 3220.47,729.33 3225.31,724.49 3225.31,710.71 v1(3227.36,708.66)
"Bank Select 0": B1.20 R63.2 | length 1304.9
  Top Layer w3.5: v1(830,930) 861.02,898.98 B1.20@910.51,898.98 ; v1(1420,1505) 1422.49,1502.51 1422.49,1490.89 1428.15,1485.24 1460.39,1485.24 R63.2@1460.63,1485
  SIG w3.5: v1(830,930) 852.36,952.36 852.36,1173.23 968.5,1289.37 968.5,1477.36 1066.93,1575.79 1399.61,1575.79 1420,1555.39 v1(1420,1505)
"Bank Select 0 Term": R63.1 U7.111 | length 171.5
  Top Layer w3.5: R63.1@1500,1485 1526.69,1485 U7.111@1629.07,1382.62
"Bank Select 1": B1.21 R64.2 | length 1309.3
  Top Layer w3.5: B1.21@910.51,930.47 950.43,930.47 975.39,905.51 975.39,845.39 v1(975,845) ; v1(1385,1540) 1409.96,1564.96 R64.2@1460.63,1565 R64.2@1460.63,1565
  SIG w3.5: v1(975,845) 975,962.2 1040.35,1027.56 1040.35,1166.34 1000.98,1205.71 1000.98,1461.61 1092.52,1553.15 1371.85,1553.15 v1(1385,1540)
"Bank Select 1 Term": R64.1 U7.110 | length 243.9
  Top Layer w3.5: R64.1@1500,1565 1527.52,1565 1595.47,1497.05 1595.47,1443.9 1642.83,1396.54 U7.110@1642.99,1396.54
CC1: J1.A5 R58.1 | length 124
  Bottom Layer w7: R58.1@2879.05,260 2922.09,260 2957.56,224.53 J1.A5@2988.35,224.53
CC2: J1.B5 R59.1 | length 561
  Bottom Layer w7: R59.1@2879.05,335 2879.92,335.87 2879.92,423.23 2956.69,500 3084.65,500 3102.36,482.28 3102.36,337.6 3089.69,324.92 J1.B5@3041.5,324.92
"CLK Input": B1.38 R60.1 | length 2254.9
  Top Layer w3.5: v1(390,785) 409.49,804.49 B1.38@459.49,804.49 ; R60.1@1910.31,255 1910.43,255.12 v1(1910.43,300.2)
  PWR w3.5: v1(390,785) 354.33,749.33 354.33,306.1 456.69,203.74 1460.63,203.74 1521.65,264.76 1875,264.76 v1(1910.43,300.2)
"CLK Input Term": R60.2 U7.43 | length 205.6
  Top Layer w3.5: U7.43@1843.43,416.61 1949.68,310.35 R60.2@1949.68,255
CLK_Enable: B1.37 U7.49 | length 2121.5
  Top Layer w3.5: v1(385,860) 409.02,835.98 B1.37@459.49,835.98 ; U7.49@1926.99,500.13 v1@1995.03,432.09
  GND2 w3.5: v1(385,860) 433.07,811.93 433.07,668.31 546.26,555.12 871.06,555.12 919.29,506.89 1035.43,506.89 1193.9,348.43 1801.18,348.43 1867.13,414.37 1977.36,414.37 v1(1995.08,432.09)
"Column Address Strobe": B1.17 R66.2 | length 1856.4
  Top Layer w3.5: v1(745,815) 755.51,804.49 B1.17@910.51,804.49 ; v1(1365,1470) 1390,1445 R66.2@1390,1419.68
  GND1 w3.5: v1(745,815) 813.03,815 869.09,871.06 869.09,1054.13 794.29,1128.94 794.29,1283.46 744.09,1333.66 744.09,1454.72 993.11,1703.74 1169.29,1703.74 1365,1508.03 v1(1365,1470)
"Column Address Strobe Term": R66.1 U7.115 | length 210
  Top Layer w3: R66.1@1390,1380.32 1391.97,1380.32 1422.28,1350 1510,1350 1515.48,1355.48 1542.46,1355.48 1571,1326.94 U7.115@1573.39,1326.94
Conf_Done: R74.2 U7.92 | length 351.5
  Top Layer w7: U7.92@1982.62,1187.75 2053.34,1258.47 R74.2@2053.34,1510
CS_1: J2.A13 J2.B13
CS_2: J2.A17 J2.B17
CS_3: J2.A21 J2.B21 U7.59 | length 984.7
  Top Layer w6: J2.B21@2005.91,-219.49 2005.91,-36.42 2187.99,145.67 2187.99,517.47 U7.59@2066.14,639.32
CS_4: J2.A25 J2.B25
"Data Bit 0": B1.2 R20.1 | length 1097.4
  Top Layer w3: B1.2@910.51,332.05 B1.2@912.13,333.66
  Top Layer w3.5: B1.2@912.13,333.66 977.36,333.66 v1@991.02,320 ; v1(1875,90) R20.1@1910.31,90
  GND1 w3.5: v1(995,320) 1225,90 v1(1875,90)
"Data Bit 0 Term": R20.2 U7.46 | length 453.1
  Top Layer w3.5: U7.46@1885.18,458.37 1886.12,458.37 1929.13,415.35 1929.13,387.8 1997.05,319.88 1997.05,106.3 1980.75,90 R20.2@1949.68,90
"Data Bit 1": B1.4 R21.1 | length 1162
  Top Layer w3.5: B1.4@910.51,395.04 946.5,395.04 986.54,355 v1(1015,355) ; v1(1880,170) R21.1@1910.31,170
  GND1 w3.5: v1(1015,355) 1255,115 1865,115 1880,130 v1(1880,170)
"Data Bit 1 Term": R21.2 U7.42 | length 304.4
  Top Layer w3.5: U7.42@1829.51,402.69 1876.97,355.23 1876.97,229.33 1894.68,211.61 1932.09,211.61 1949.68,194.02 R21.2@1949.68,170
"Data Bit 2": B1.5 R23.1 | length 1063.8
  Top Layer w3: v1(1810,145) v1@1810.21,145.21 ; R23.1@1830,175.32 R23.1@1831.69,173.62
  Top Layer w3.5: B1.5@910.51,426.54 961.53,426.54 998.07,390 v1(1030,390) ; v1@1810.21,145.21 1823.36,145.21 1831.69,153.54 R23.1@1831.69,173.62
  GND1 w3.5: v1(1030,390) 1275,145 v1(1810,145)
"Data Bit 2 Term": R23.2 U7.39 | length 163.8
  Top Layer w3.5: U7.39@1787.75,360.93 1830,318.68 R23.2@1830,214.68
"Data Bit 3": B1.7 R24.1 | length 975.4
  Top Layer w3.5: B1.7@910.51,489.53 910.87,489.17 942.91,489.17 1017.09,415 v1(1050,415) ; v1(1697.83,179.13) 1720.47,179.13 1721.46,178.15 1752.17,178.15 R24.1@1753.09,177.22
  GND1 w3.5: v1(1050,415) 1290,175 1616.93,175 1621.06,179.13 v1(1697.83,179.13)
"Data Bit 3 Term": R24.2 U7.38 | length 168.5
  Top Layer w3.5: R24.2@1755,214.68 1755,238.27 1808.07,291.34 1808.07,312.77 U7.38@1773.83,347.01
"Data Bit 4": B1.8 R25.1 | length 1071.9
  Top Layer w3.5: B1.8@910.51,521.02 958.98,521.02 v1(1020,460)
  Bottom Layer w3.5: v1(1020,460) 1048.86,460 1131.89,376.97 1312.01,376.97 1450.79,238.19 1450.79,117.13 1488.19,79.72 1695.87,79.72 1700.32,84.18 1700.32,93.2 1700,93.52 R25.1@1700,110.63
"Data Bit 4 Term": R25.2 U7.34 | length 288.9
  Top Layer w3.5: U7.34@1629.07,360.93 1587.6,319.47 1587.6,295.28 1648.62,234.25 v1(1648.62,218.5)
  Bottom Layer w3.5: v1(1648.62,218.5) 1648.62,177.17 1675.79,150 R25.2@1700,150
"Data Bit 5": B1.10 R26.1 | length 966.8
  Top Layer w3.5: B1.10@910.51,584.02 913.82,580.71 949.8,580.71 1055.51,475 v1(1160,475)
  Bottom Layer w3.5: v1(1160,475) 1196.02,438.98 1366.14,438.98 1569.88,235.24 1569.88,130.91 1590.47,110.32 R26.1@1620,110.32
"Data Bit 5 Term": R26.2 U7.33 | length 283.7
  Top Layer w3.5: v1(1595,210) 1595,247.52 1562.99,279.53 1562.99,322.7 U7.33@1615.15,374.85
  Bottom Layer w3.5: v1(1595,210) 1593.5,208.5 1593.5,155.51 1599.33,149.68 R26.2@1620,149.68
"Data Bit 6": B1.11 R27.1 | length 931.6
  Top Layer w3.5: B1.11@910.51,615.51 961.26,615.51 1071.77,505 v1(1090,505)
  Bottom Layer w3.5: v1(1090,505) 1090,465.12 1143.7,411.42 1325.55,411.42 1485.64,251.33 1485.64,132.47 1507.48,110.63 R27.1@1540,110.63
"Data Bit 6 Term": R27.2 U7.32 | length 264.1
  Top Layer w3.5: v1(1540,220) 1540,327.55 U7.32@1601.23,388.77
  Bottom Layer w3.5: R27.2@1540,150 v1(1540,220)
"Data Bit 7": B1.13 R28.1 | length 759.3
  Top Layer w3.5: B1.13@910.51,678.5 940.59,678.5 1075.79,543.31 1136.81,543.31 1435.31,244.8 R28.1@1435.31,190
"Data Bit 7 Term": R28.2 U7.31 | length 259.3
  Top Layer w3.5: R28.2@1474.68,190 1474.68,290.07 U7.31@1587.31,402.69
"Data Bit 8": B1.42 R29.1 | length 763.2
  Top Layer w3.5: B1.42@459.49,678.5 518.5,678.5 v1(555,715) ; v1(990,1095) 1022.59,1062.41 1033.22,1062.41 R29.1@1035.63,1060
  PWR w3.5: v1(555,715) 935,1095 v1(990,1095)
"Data Bit 8 Term": R29.2 U7.141 | length 175.8
  Top Layer w3.5: R29.2@1075,1060 1116.52,1060 U7.141@1211.48,965.04
"Data Bit 9": B1.44 R30.1 | length 972.7
  Top Layer w3.5: B1.44@459.49,615.51 519.06,615.51 545,641.46 v1(545,665)
  Bottom Layer w3.5: v1(545,665) 689.33,665 713.58,640.75 1024.61,640.75 1043.31,659.45 1128.94,659.45 1173.23,615.16 1220.47,615.16 1240.16,595.47 1240.16,523.62 1254.92,508.86 1273.54,508.86 R30.1@1275,510.32
"Data Bit 9 Term": R30.2 U7.11 | length 157.9
  Top Layer w3.5: v1(1260,600) 1260,632.16 U7.11@1308.92,681.08
  Bottom Layer w3.5: v1(1260,600) 1275,585 R30.2@1275,549.68
"Data Bit 10": B1.45 R31.1 | length 793.7
  Top Layer w3.5: B1.45@459.49,584.02 529.02,584.02 v1(560,615)
  Bottom Layer w3.5: v1(560,615) 1036.57,615 1143.7,507.87 1192.56,507.87 R31.1@1195,510.32
"Data Bit 10 Term": R31.2 U7.10 | length 187.9
  Top Layer w3.5: v1(1209.65,584.65) 1209.65,609.65 U7.10@1295,695
  Bottom Layer w3.5: R31.2@1195,549.68 1195,571.97 1207.68,584.65 v1(1209.65,584.65)
"Data Bit 11": B1.47 R32.1 | length 1310.6
  Top Layer w3.5: B1.47@459.49,521.02 463.78,516.73 566.93,516.73 598.66,485 v1(615,485)
  GND1 w3.5: v1(615,485) 949.57,485 1014.76,550.2 1202.76,550.2 1250.98,501.97 1409.45,501.97 1489.17,581.69 1601.38,581.69 1619.09,563.98 v1(1619.09,561.02)
  Bottom Layer w3.5: v1(1619.09,561.02) 1632.76,561.02 1635.31,558.46 R32.1@1635.31,530
"Data Bit 11 Term": R32.2 U7.28 | length 188.4
  Top Layer w3.5: U7.28@1545.55,444.45 1591.1,490 v1(1675,490)
  Bottom Layer w3.5: R32.2@1674.68,530 1675,529.68 v1(1675,490)
"Data Bit 12": B1.48 R33.1 | length 1165.2
  Top Layer w3.5: B1.48@459.49,489.53 545.47,489.53 v1(590,445) ; v1(1185,1155) R33.1@1215,1155
  PWR w3.5: v1(590,445) 640.87,445 930.12,734.25 930.12,848.43 1149.61,1067.91 1149.61,1119.61 v1(1185,1155)
"Data Bit 12 Term": R33.2 U7.132 | length 109.2
  Top Layer w3.5: R33.2@1254.37,1155 1272.07,1155 U7.132@1336.76,1090.31
"Data Bit 13": B1.50 R34.1 | length 1415.1
  Top Layer w3.5: B1.50@459.49,426.54 533.46,426.54 573.86,386.14 v1(593.75,386.14)
  PWR w3.5: v1(593.75,386.14) 647.95,386.14 1001.97,740.16 1103.35,740.16 1248.03,884.84 1324.84,884.84 v1(1390,950)
  Bottom Layer w3: R34.1@1240,1109.68 1260.31,1109.68 1262.07,1107.93 1363.35,999.44 ccw(c1378.23,1013.34) 1366.7,996.55 1388.24,981.76 1390,980 v1(1390,950)
"Data Bit 13 Term": R34.2 U7.133 | length 216
  Top Layer w3.5: v1(1200,1115) 1284.23,1115 U7.133@1322.84,1076.39
  Bottom Layer w3.5: v1(1200,1115) 1199.8,1114.8 1199.8,1083.66 1213.15,1070.32 R34.2@1240,1070.32
"Data Bit 14": B1.51 R35.1 | length 1408.5
  Top Layer w3.5: B1.51@459.49,395.04 499.96,395.04 553.75,341.25 v1(571.14,341.25)
  PWR w3.5: v1(571.14,341.25) 571.14,365.87 562.99,374.02 548.23,374.02 536.42,385.83 536.42,461.61 594.49,519.68 636.81,519.68 892.72,775.59 892.72,876.97 1125,1109.25 v1(1125,1210)
  Bottom Layer w3: v1(1125,1210) 1125,1139.37 1144.69,1119.68 1144.69,1117.71 1153.03,1109.37 R35.1@1155,1109.37
"Data Bit 14 Term": R35.2 U7.135 | length 316.7
  Top Layer w3.5: U7.135@1295,1048.55 1345,998.55 v1(1345,979.89)
  Bottom Layer w3.5: R35.2@1155,1070 1187.87,1070 1236.22,1021.65 1303.24,1021.65 v1(1345,979.89)
"Data Bit 15": B1.53 R36.1 | length 1676
  Top Layer w3: v1(1065,1229.89) v1@1065.11,1229.89
  Top Layer w3.5: B1.53@459.49,332.05 508.5,332.05 534.45,306.1 534.45,283.46 567.91,250 v1(605,250) ; v1@1065.11,1229.89 1080,1215 1080,1130 1100,1110 R36.1@1130,1110
  PWR w3.5: v1(605,250) 605.31,250.32 605.31,282.48 589.57,298.23 527.56,298.23 504.92,320.87 504.92,484.25 567.91,547.24 617.13,547.24 859.25,789.37 859.25,902.56 1044.29,1087.6 1044.29,1209.18 v1(1065,1229.89)
"Data Bit 15 Term": R36.2 U7.136 | length 216.7
  Top Layer w3.5: R36.2@1130,1149.37 1152.8,1149.37 1171.26,1130.91 1171.26,1099.41 1192.91,1077.76 1237.96,1077.76 1280.27,1035.44 U7.136@1280.27,1034.63
DCLK: IC1.6 U7.12 | length 1271.8
  Top Layer w7: IC1.6@964.96,1668.31 965.55,1667.72 v1(965.55,1597.44) ; U7.12@1322.84,667.16 1322.84,667.56 1353.38,698.1 1353.38,708.38 v1(1390,745)
  GND1 w7: v1(965.55,1597.44) 965.55,1570.55 885,1490 885,1300 1390,795 v1(1390,745)
EN: C15.1 R57.1 U8.3 | length 238.8
  Top Layer w7: U8.3@2631.18,322.4 2631.18,361.18 v1(2655,385)
  Bottom Layer w7: R57.1@2588.36,495 2590.22,493.14 2590.22,410 2639.21,410 2652.95,396.26 2652.95,387.05 v1(2655,385)
EN_1.2V: R80.1 R81.2 U3.5 U10.6 | length 451.7
  Top Layer w7: U3.5@3172.24,1096.46 3192.91,1096.46 3205,1108.54 v1(3205,1140)
  Bottom Layer w5: R80.1@3155.51,926.18 3155.51,1004.92 R81.2@3152.56,1007.87 3152.56,1087.56 v1(3205,1140)
  Bottom Layer w7: U10.6@3016.73,937.99 3073.82,937.99 3088.15,923.67 3153,923.67 R80.1@3155.51,926.18
FB_Voltage_1.2: R1.2 R2.1 U3.1 | length 305.3
  Top Layer w5: R2.1@2932.09,1283.46 2933.24,1282.31 R1.2@2933.24,1235.49 2937.65,1231.08 2937.65,1220.09 2961.61,1196.13 2961.61,1153.54 2999.02,1116.14 U3.1@3109.25,1116.14
FB_Voltage_2.5: R6.2 R7.1 U4.1 | length 205.6
  Top Layer w5: R6.2@2990.16,834.65 2990.16,815.94 2995.08,811.02 3017.72,811.02 3023.62,805.12 3023.62,785.43 3060.04,785.43 3113.5,731.97 U4.1@3113.5,714.68
"FPGA DI": R100.1 U7.13 | length 1006.8
  Top Layer w3.5: v1(930.9,1302.72) 948.82,1320.63 948.82,1374.92 R100.1@949.89,1375.98
  Top Layer w7: U7.13@1336.76,653.24 1413.52,730 v1(1445,730)
  GND1 w7: v1(930.9,1302.72) 1445,788.62 v1(1445,730)
"FPGA DO": IC1.5 R52.2 | length 88.2
  Top Layer w7: IC1.5@1014.96,1668.31 1018.7,1672.05 R52.2@1018.7,1754.92
FPGA_DO: R52.1 U7.6 | length 1196.8
  Top Layer w7: R52.1@1058.07,1754.92 1058.07,1719.49 1087.6,1689.96 1087.6,1675.2 v1(1086.61,1674.21) ; U7.6@1239.32,750.68 1265.75,777.11 1266.15,777.11 1274.72,785.68 v1(1274.72,831.21)
  GND2 w7: v1(1086.61,1674.21) 1220.79,1674.21 1285,1610 1285,1227.2 1274.72,1216.92 v1(1274.72,831.21)
GND: B1.28 B1.54 C7.2 C8.2 C9.2 C10.2 C11.1 C12.1 C13.2 C14.1 C15.2 C16.2 C17.1 C18.2 C19.1 C20.1 C21.2 C22.1 C23.2 C24.1 C25.1 C26.2 C27.2 C28.1 C29.2 C30.2 C31.2 C32.2 C33.2 C34.1 C35.2 CJ_1.1 CJ_2.1 D1.2 D2.1 D5.1 D7.2 D8.2 D9.2 D10.2 D11.2 D11.5 IC1.4 J1.1 J1.2 J1.3 J1.4 J1.A1 J1.A12 J1.B1 J1.B12 J2.A4 J2.A6 J2.A8 J2.A10 J2.A12 J2.A14 J2.A16 J2.A18 J2.A20 J2.A22 J2.A24 J2.A26 J2.B4 J2.B6 J2.B8 J2.B10 J2.B12 J2.B14 J2.B16 J2.B18 J2.B20 J2.B22 J2.B24 J2.B26 P1.2 P1.10 Q2.2 Q3.2 Q4.2 Q5.2 Q6.2 Q7.2 Q8.2 Q9.2 Q10.2 R1_2.1 R2.2 R2_2.1 R3_2.1 R4_2.1 R5_2.1 R6_2.1 R7_2.1 R8.2 R8_2.1 R9.1 R9_2.1 R10.1 R53.1 R54.1 R55.1 R56.1 R58.2 R59.2 R81.1 R86.1 R103.1 R110.1 SW1.3 SW2.3 SW3.3 SW4.3 SW5.3 SW5.4 U3.2 U4.2 U7.4 U7.19 U7.21 U7.22 U7.23 U7.25 U7.27 U7.36 U7.41 U7.48 U7.57 U7.63 U7.79 U7.82 U7.95 U7.96 U7.97 U7.108 U7.118 U7.123 U7.131 U7.140 U7.145 U8.2 U10.2 Y1.2 Y2.2 | length 62.6
  Top Layer w7: v1(3077.78,693.87) 3078.35,694.44 3112.94,694.44 U4.2@3113.5,695 ; v1(3083.34,1097.74) 3083.98,1097.1 3108.61,1097.1 U3.2@3109.25,1096.46
  other v1: 1671.81,-70.87 1716.81,-70.87 1761.81,-70.87 2025.59,187.01 2062.01,230.32 2095.47,268.7 293.31,301.1 293.31,351.1 293.31,401.1 293.31,451.1 3255,495 293.31,501.1 3290,530 293.31,556.1 3320,565 291.34,607.2 291.34,657.2 291.34,707.2 291.34,757.2 291.34,807.2 2695,840 2740,840 291.34,862.2 2695,885 2695,930 3045,1060 3020,1085 3015,1145 1165.35,1189.96 2405.87,1203.78 2450.87,1203.78 2495.87,1203.78 2405.87,1268.78 2450.87,1268.78 2495.87,1268.78 3085,1315 3130,1315 3175,1315 3220,1315 3265,1315 2505,1375 3085,1380 3130,1380 3175,1380 3220,1380 3265,1380 2170,1460 2230,1460 2285,1460 2335,1460 2390,1460 3295,1820 3295,1870 3295,1920 3295,1970 3295,2020 3295,2075 3293.03,2126.1 3293.03,2176.1 3293.03,2226.1 3293.03,2276.1 3293.03,2326.1 3293.03,2381.1
  other v2: 1708.41,749.29 1677.78,779.91 1739.03,779.91 1647.16,810.53 1708.41,810.53 1769.65,810.53 1616.54,841.15 1677.78,841.15 1739.03,841.15 1800.28,841.15 1585.92,871.78 1647.16,871.78 1708.41,871.78 1769.65,871.78 1830.9,871.78 1616.54,902.4 1677.78,902.4 1739.03,902.4 1800.28,902.4 1647.16,933.02 1708.41,933.02 1769.65,933.02 1677.78,963.64 1739.03,963.64 1708.41,994.27